# Altium PCB Step Up Converter_rev_final.PCBDOC
Units mm, origin at the board's own origin, x right, y up, seen from the top; angles counter-clockwise.
Board outline 30 x 20 mm, 4 copper layers (Top Layer, Layer 1, Layer 2, Bottom Layer), stack 0.603 mm thick; 24 components, 14 nets, 93 pads, 90 vias.
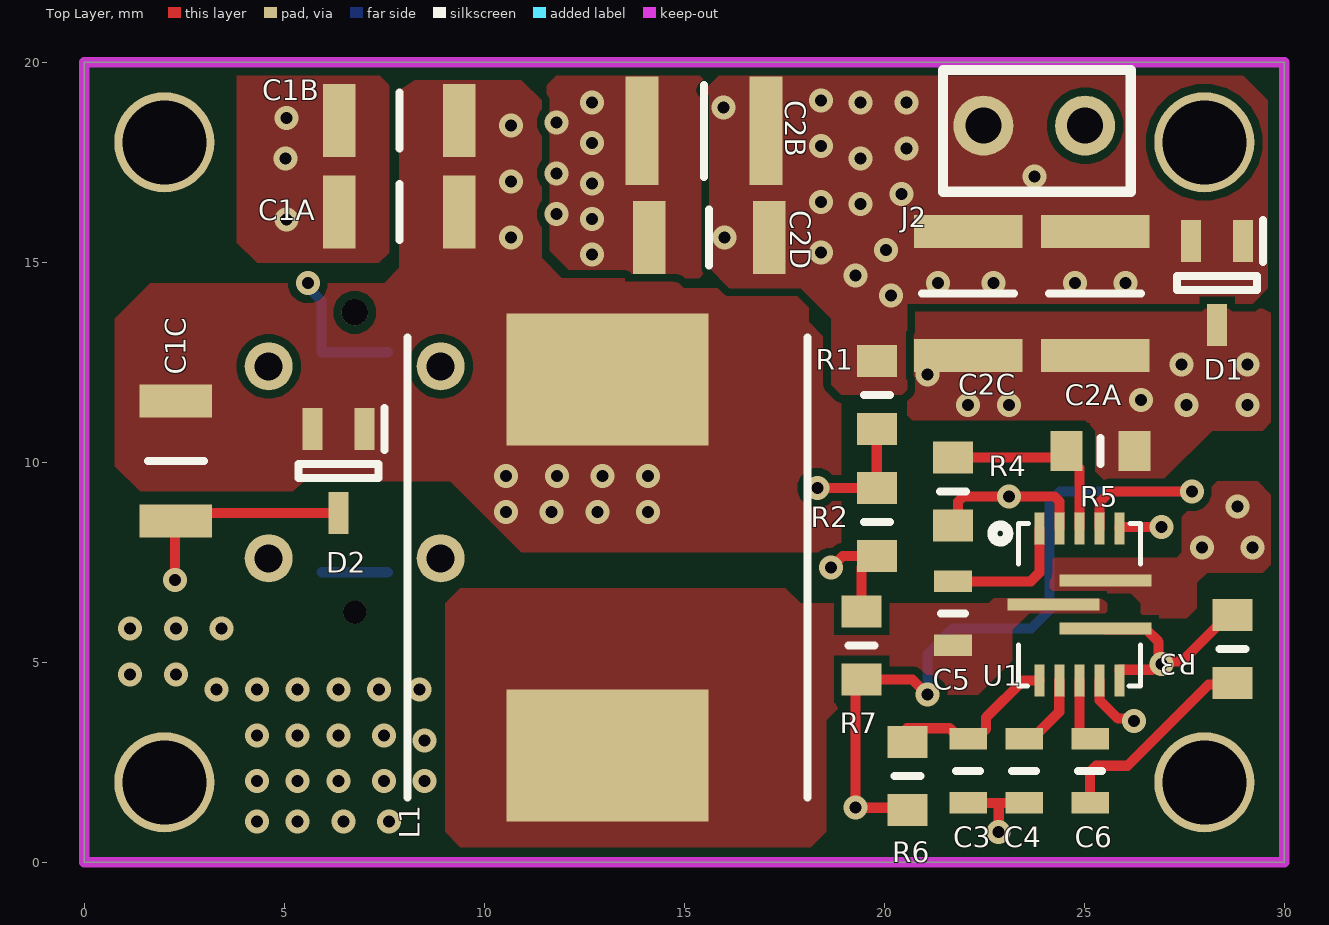
[diagram p0: Top Layer view]
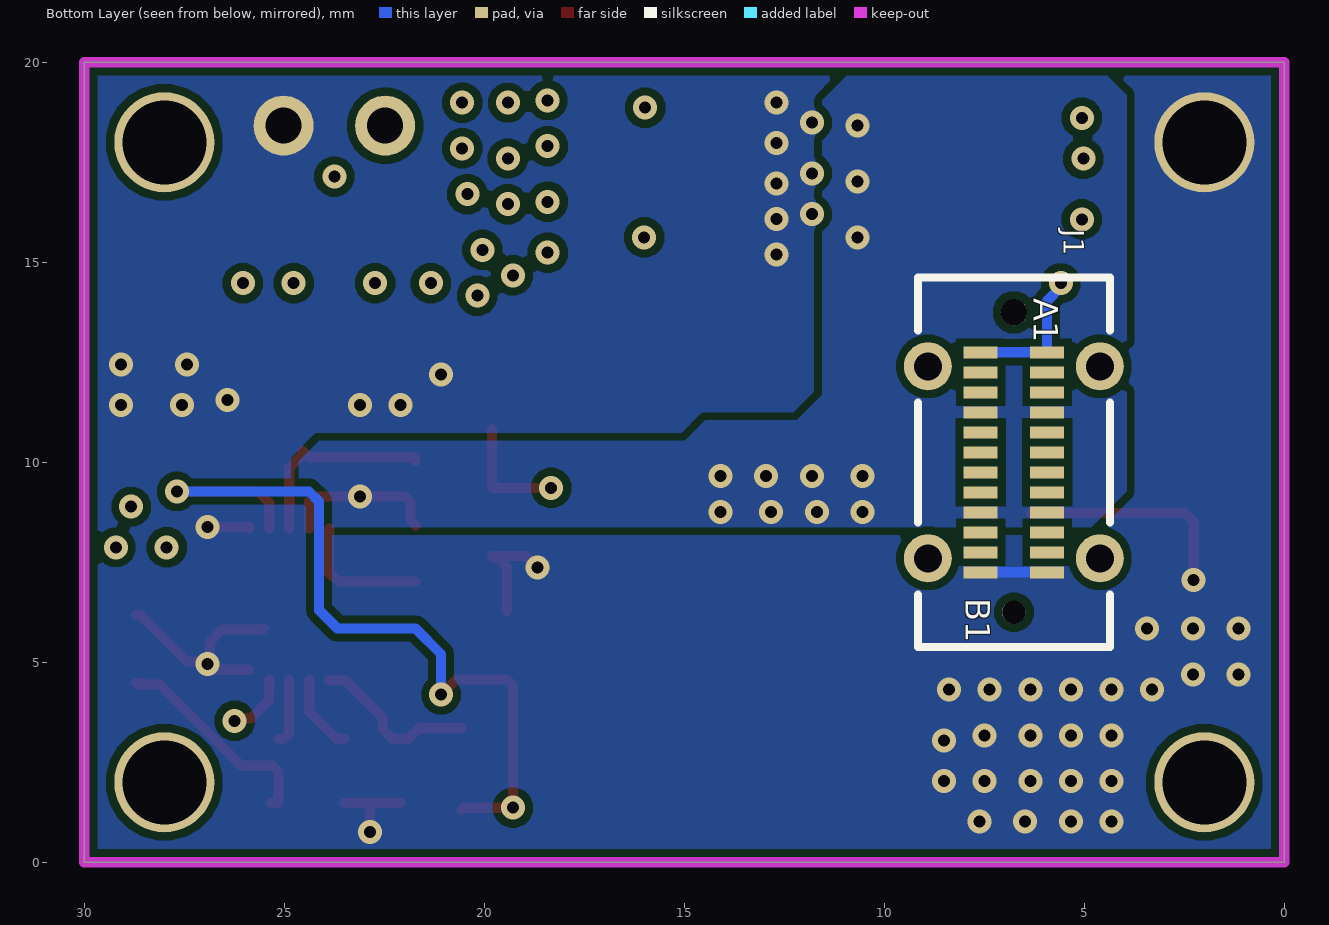
[diagram p1: Bottom Layer view, seen from below]
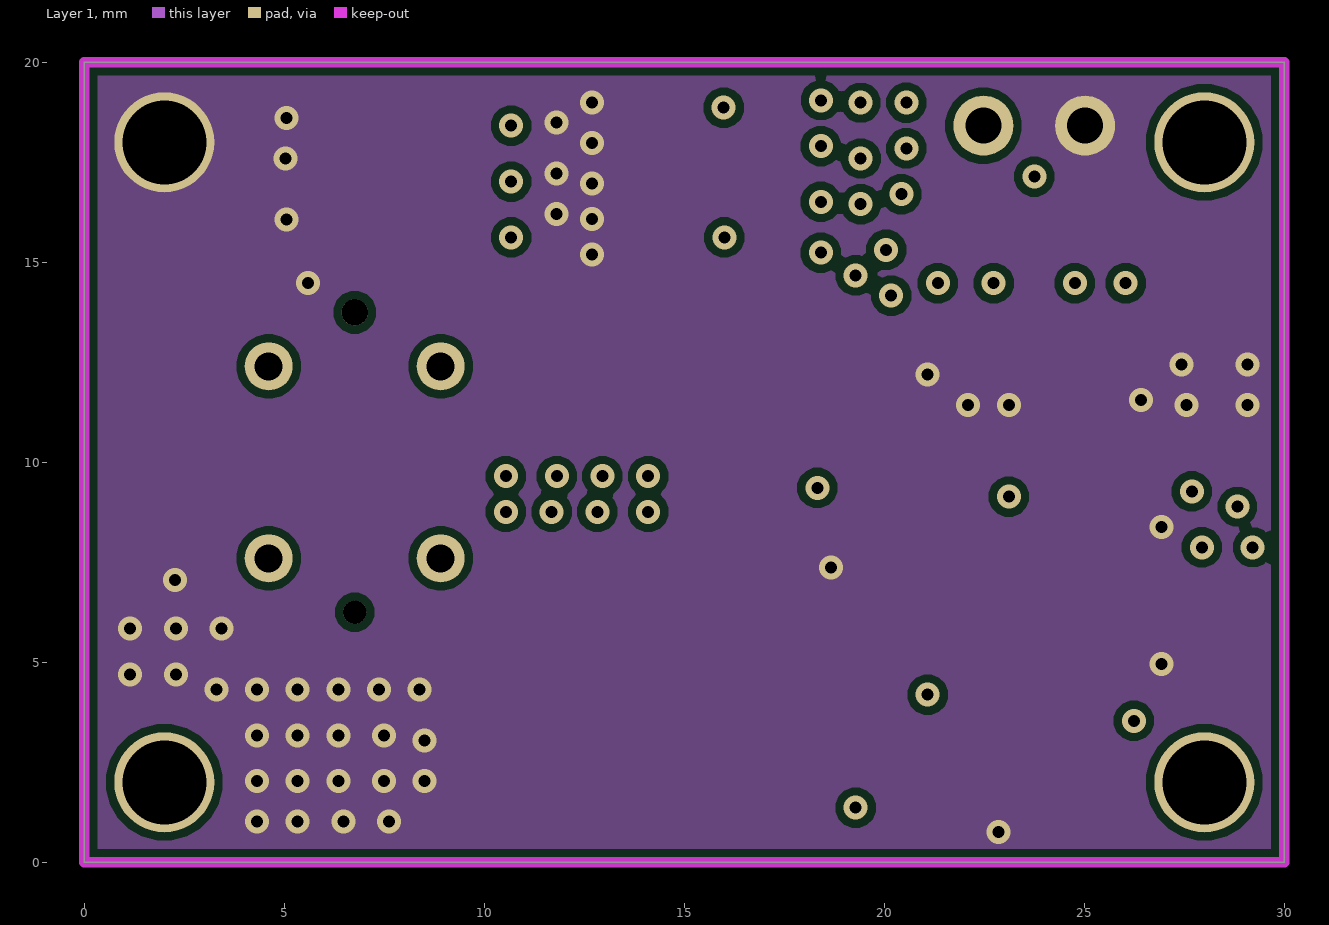
[diagram p2: Layer 1]
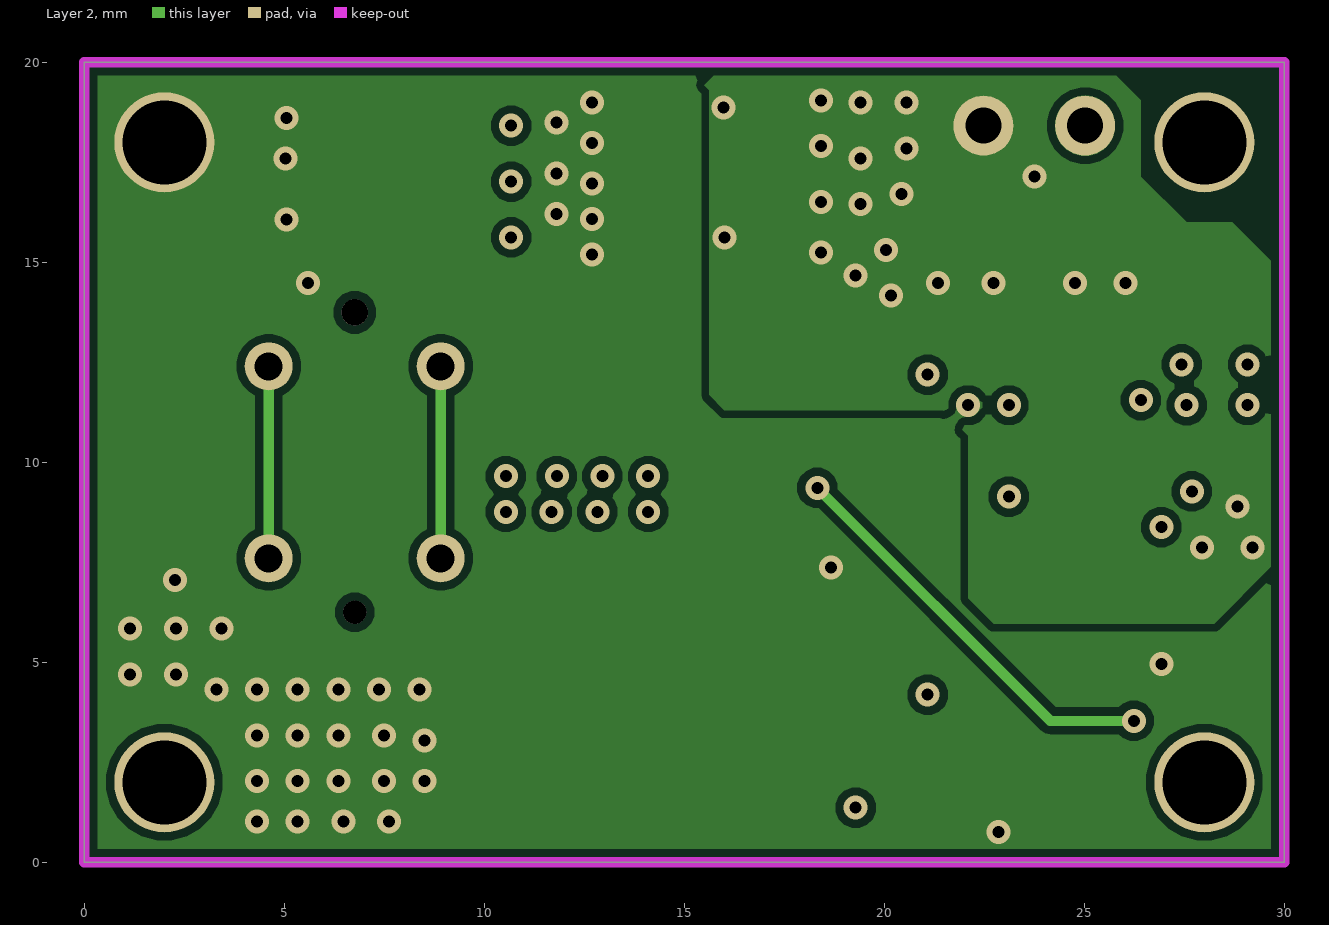
[diagram p3: Layer 2]
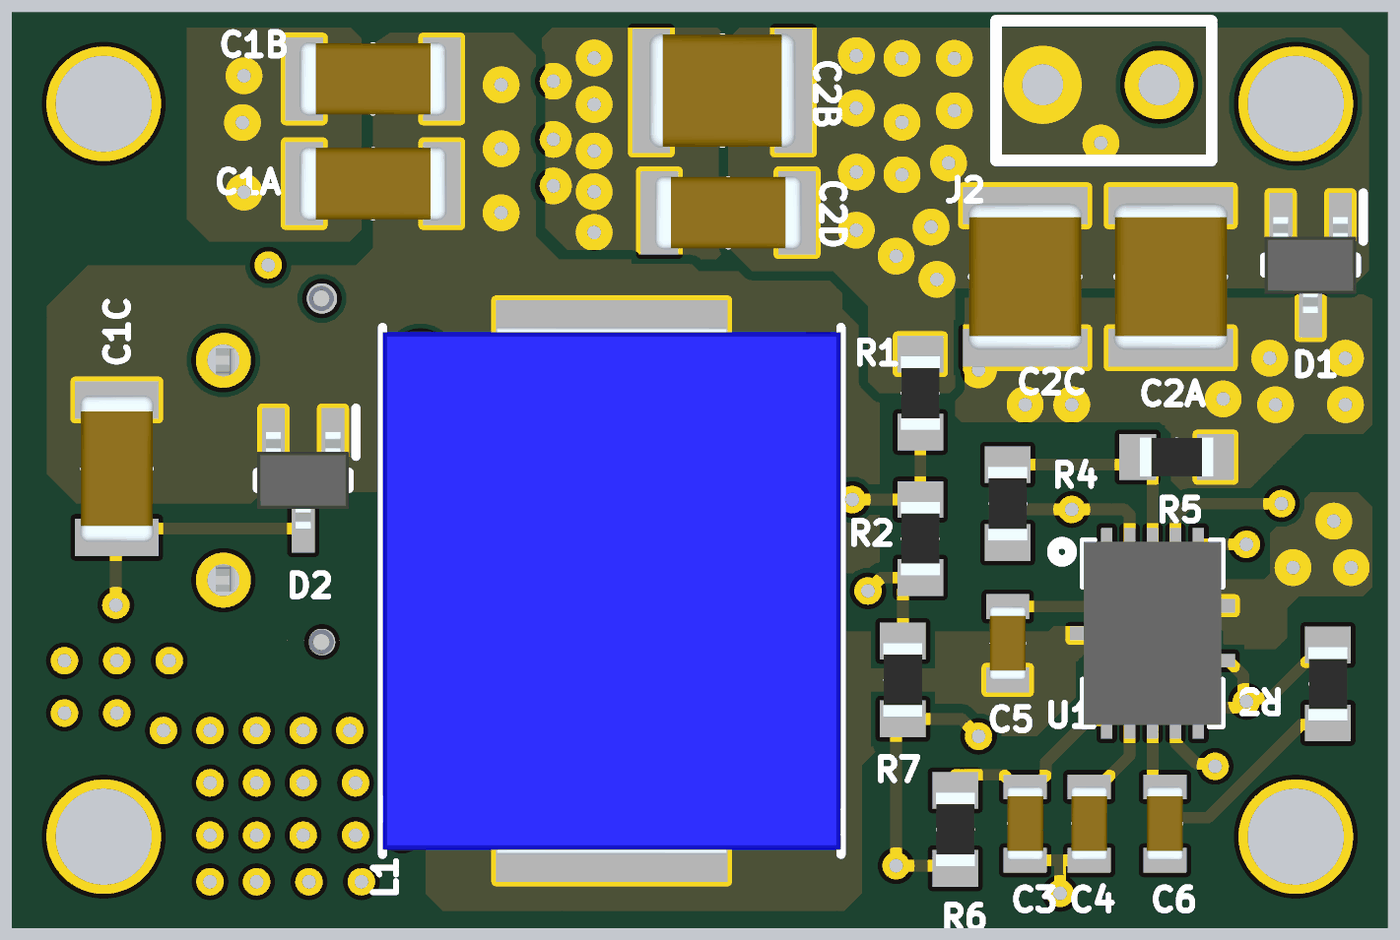
[diagram p4: 3D render of the assembled board from above, using the file's embedded part models]

## Layer stack, top to bottom
Top Solder: solder mask 0.0102, Solder Resist, Dk 3.5
Top Layer: signal copper 0.0356
Dielectric 2: prepreg 0.0711, PP-006, Dk 4.1
Layer 1: signal copper 0.035
Dielectric 1: dielectric 0.32, FR-4, Dk 4.8
Layer 2: signal copper 0.035
Dielectric 3: prepreg 0.0711, PP-006, Dk 4.1
Bottom Layer: signal copper 0.0356
Bottom Solder: solder mask 0.0102, Solder Resist, Dk 3.5

## Board outline
0,0 ccw(c0,0) 0,0 30,0 ccw(c30,0) 30,0 30,20 ccw(c30,20) 30,20 0,20 ccw(c0,20) 0,20
board region "Default Layer Stack Region": 0,0 0,20 30,20 30,0
board region "Default Layer Stack Region_1": 0,0 0,20 30,20 30,0

## Design rules (kind name [scope] priority, off if disabled: settings)
Clearance [All] p1: gap=0.2 ignorepadtopadclearanceinfootprint=FALSE except(0.1: Arc-Text Track-Text SMDPad-Text THPad-Text Via-Text Fill-Text Poly-Text Region-Text Text-Text; 0.127: SMDPad-SMDPad; 0.254: Arc-Via Track-Via Via-Via; 0.5: SMDPad-Hole THPad-THPad THPad-Hole)
ComponentClearance [All] p1: gap=0 collisioncheckmode=3 verticalgap=0 showdistances=TRUE
MinimumSolderMaskSliver [All] p1: minsoldermaskwidth=0.01
PolygonConnect PolygonConnect_1 [All vs IsNamedPolygon('GND_L02_P009')] p1: connectstyle=Relief reliefconductorwidth=0.254 reliefentries=4 polygonreliefangle="90 Angle" airgapwidth=0.254
PolygonConnect [All] p2: connectstyle=Direct reliefconductorwidth=0.254 reliefentries=4 polygonreliefangle="90 Angle" airgapwidth=0.254
RoutingVias [All] p1: holewidth=0.3 width=0.6 viastyle="Through Hole" minholewidth=0.3 minwidth=0.3 maxholewidth=0.6 maxwidth=0.8
SolderMaskExpansion [All] p1: expansion=0.102 istentingtop=FALSE
UnRoutedNet [All] p1: checkbadconnections=TRUE
Width [All] p1: maxlimit=10 minlimit=0.127 preferedwidth=0.254
27 further rules are at their usual default settings.

## Components (designator, comment, footprint, x,y, rotation, side; value= is the part's Value field where it differs from the comment)
C1A "Cap" CAPC3216X190N 7.874,16.256 r0 top value=22uF
C1B "Cap" CAPC3216X190N 7.874,18.542 r0 top value=22uF
C1C "Cap" CAPC3216X190N 2.286,10.033 r90 top value=22uF
C2A "Cap" CAPC3225X270N 25.273,14.224 r90 top value=22uF
C2B "Cap" CAPC3225X270N 15.494,18.288 r0 top value=22uF
C2C "Cap" CAPC3225X270N 22.098,14.224 r90 top value=22uF
C2D "Cap" CAPC3216X190N 15.621,15.621 r0 top value=0.1uF
C3 "Cap" CAPC1608X90N 22.098,2.286 r90 top value=4.7uF
C4 "Cap" CAPC1608X90N 23.495,2.286 r270 top value=22nF
C5 "Cap" CAPC1608X90N 21.717,6.223 r270 top value=0.1uF
C6 "Cap" CAPC1608X90N 25.146,2.286 r90 top value=8.2nF
D1 "ESDA25W" SOT65P210X110-3N 28.321,14.478 r270 top
D2 "ESDA25W" SOT65P210X110-3N 6.35,9.779 r270 top
J1 "632722110112" 632722110112 6.76,10 r270 bottom locked
J2 "conn" CONN 23.749,18.415 r0 top
L1 "1.5uH" INDPM115100X400N 13.081,7.366 r270 top locked
R1 "RC(0603_50V0805_150V1206_200V2512_200V" RESC1608X55N 19.812,11.684 r90 top value=750k
R2 "RC(0603_50V0805_150V1206_200V2512_200V" RESC1608X55N 19.812,8.509 r90 top value=187k
R3 "RC(0603_50V0805_150V1206_200V2512_200V" RESC1608X55N 28.702,5.334 r90 top value=3k
R4 "RC(0603_50V0805_150V1206_200V2512_200V" RESC1608X55N 21.717,9.271 r90 top value=30k
R5 "RC(0603_50V0805_150V1206_200V2512_200V" RESC1608X55N 25.4,10.287 r0 top value=34.8k
R6 "RC(0603_50V0805_150V1206_200V2512_200V" RESC1608X55N 20.574,2.159 r270 top value=NC
R7 "RC(0603_50V0805_150V1206_200V2512_200V" RESC1608X55N 19.431,5.422 r90 top value=NC
U1 "MP3429" FCQFN-13L(3MMX4MM) 24.877,6.442 r0 top locked

## Footprints (in the part's own frame and the unit in brackets; to place one, negate y for a bottom-side part, rotate by r counter-clockwise, add the part's x,y. Pads: shape width x height; smd on the part's side, far side on the other; paste and mask are expansions set on the pad)
632722110112 [mm]
  rect 0.3x0.85 smd: A1(-2.75,0.83) A2(-2.25,0.83) A3(-1.75,0.83) A4(-1.25,0.83) A5(-0.75,0.83) A6(-0.25,0.83) A7(0.25,0.83) A8(0.75,0.83) A9(1.25,0.83) A10(1.75,0.83) A11(2.25,0.83) A12(2.75,0.83) B1(2.75,-0.83) B2(2.25,-0.83) B3(1.75,-0.83) B4(1.25,-0.83) B5(0.75,-0.83) B6(0.25,-0.83) B7(-0.25,-0.83) B8(-0.75,-0.83) B9(-1.25,-0.83) B10(-1.75,-0.83) B11(-2.25,-0.83) B12(-2.75,-0.83)
  round 1.2 hole 0.7: S1(-2.4,2.15) S2(2.4,2.15) S3(-2.4,-2.15) S4(2.4,-2.15)
  round 0.66 hole 0.66 unplated: ""(-3.75,0)
  round 0.58 hole 0.58 unplated: ""(3.75,0)
  silkscreen extent -4.62,-2.4 4.62,2.4, body extent -4.47,-2.29 4.47,2.31, height 1
CAPC1608X90N [mm]
  rect 0.54x0.94 smd: 1(-0.8,0) 2(0.8,0)
  silkscreen extent 0,-0.3 0,0.3, body extent -0.8,-0.4 0.8,0.4, height 0.9
CAPC3216X190N [mm]
  rect 0.82x1.82 smd: 1(-1.5,0) 2(1.5,0)
  silkscreen extent 0,-0.7 0,0.7, body extent -1.6,-0.8 1.6,0.8, height 1.9
CAPC3225X270N [mm]
  rect 0.82x2.72 smd: 1(-1.55,0) 2(1.55,0)
  silkscreen extent 0,-1.15 0,1.15, body extent -1.6,-1.25 1.6,1.25, height 2.7
CONN [mm]
  round 1.5 hole 0.9: 1(-1.27,0) 2(1.27,0)
  silkscreen extent -2.29,-1.65 2.41,1.4
FCQFN-13L(3MMX4MM) [mm]
  rect 2.3x0.3 smd: 1(-0.65,0) 7(0.65,-0.6) 8(0.65,0.6)
  rect 0.25x0.8 smd: 2(-1,-1.9) 3(-0.5,-1.9) 4(0,-1.9) 5(0.5,-1.9) 6(1,-1.9) 9(1,1.9) 10(0.5,1.9) 11(0,1.9) 12(-0.5,1.9) 13(-1,1.9)
  silkscreen extent -2.17,-2.03 1.52,2.03, body extent -1.5,-2 1.5,2, height 1.1
INDPM115100X400N [mm]
  rect 3.3x5.05 smd: 1(-4.7,0) 2(4.7,0)
  silkscreen extent -5.75,-5 5.75,5, body extent -5.75,-5 5.75,5, height 4
RESC1608X55N [mm]
  rect 0.8x1 smd: 1(-0.85,0) 2(0.85,0)
  silkscreen extent 0,-0.33 0,0.33, body extent -0.8,-0.43 0.8,0.43, height 0.55
SOT65P210X110-3N [mm]
  rect 1.05x0.5 smd: 1(-1.05,0.65) 2(-1.05,-0.65) 3(1.05,0)
  silkscreen extent -1.58,-1 0.18,1.15, body extent -1.05,-1 1.05,1, height 1.1

## Part data
C1A C1B C1C: "16V, ceramic Capacitor", Manufacturer=muRata, Manufacturer P/N=GRM32R71C476KL, Package=1210
C2A C2B C2C: "25V, ceramic Capacitor", Manufacturer=muRata, Manufacturer P/N=GRM32R71E226KL, Package=1210
C2D: "25V, ceramic Capacitor", Manufacturer=muRata, Manufacturer P/N=GRM21AR71E105KL, Package=0805
C3: "25V, ceramic Capacitor", Manufacturer=muRata, Manufacturer P/N=GRM21AR71E475KL, Package=0805
C4: "50V ceramic capacitor", Manufacturer=muRata, Manufacturer P/N=GRM188R71H223KL, Package=0603
C5: "50V, ceramic Capacitor", Manufacturer=muRata, Manufacturer P/N=GRM21AR71H104KL, Package=0805
C6: "50V ceramic capacitor", Manufacturer=muRata, Manufacturer P/N=GRM188R71H472KL, Package=0603
D1 D2: "Diode", Manufacturer_Name=STMicroelectronics, Mouser2 Part Number=511-ESDA25W, Datasheet Link=https://componentsearchengine.com//ESDA25W.pdf, Height=1.1mm, Mouser2 Price/Stock=https://www.mouser.com/Search/Refine.aspx?Keyword=511-ESDA25W
  D1: Manufacturer_Part_Number=ESDA25W
  D2: Manufacturer P/N=ESDA25W
J1: "USB-C (USB TYPE-C) USB 3.1 (USB 3.1 Gen 2, Superspeed+) Receptacle Connector 24 Position Surface Mount, Through Hole", Package=None, Availability=Warning, DigiKey-Purchase-URL=https://snapeda.com/shop?store=DigiKey&id=3596593, Manufacturer P/N=632722110112, MF="Wurth Electronics", Mouser-Purchase-URL=https://snapeda.com/shop?store=Mouser&id=3596593, Price=None, SnapEDA_Link=https://www.snapeda.com/parts/632722110112/Wurth%20Electronics%20Inc./view-part/3596593/?ref=snap
L1: library part 104CDMCCDS-220MC, "Inductor", Manufacturer_Name=Sumida, Mouser2 Part Number=851-104CDMCCDS-220MC, Datasheet Link=https://componentsearchengine.com//104CDMCCDS-220MC.pdf, Height=4mm, Manufacturer_Part_Number=104CDMCCDS-220MC, Mouser2 Price/Stock=https://www.mouser.com/Search/Refine.aspx?Keyword=851-104CDMCCDS-220MC
R1 R6 R7: library part SMR, "Film resistor, 1%", Manufacturer=YAGEO, Manufacturer P/N=RC0603FR-07330KL, Package=0603
R2: library part SMR, "Film resistor, 1%", Manufacturer=YAGEO, Manufacturer P/N=RC0603FR-0741K2L, Package=0603
R3: library part SMR, "Film resistor, 5%", Manufacturer=YAGEO, Manufacturer P/N=RC0603FR-0710KL, Package=0603
R4: library part SMR, "Film resistor, 5%", Manufacturer=YAGEO, Manufacturer P/N=RC0603FR-0727KL, Package=0603
R5: library part SMR, "Film resistor, 5%", Package=0603
U1: "16V,17A Synchronous Boost  with Programmable Output Current Limit", Manufacturer=MPS, Manufacturer P/N=MP3429GL, Package=QFN-13(3mmx4mm)

## Free pads (board coordinates)
  round 2.5 hole 2.1: 0(2,2) 0(2,18) 0(28,2) 0(28,18)

## Via types
v1: diameter 0.6, hole 0.3, Top Layer to Bottom Layer, 90 vias

## Nets (pads, with @x,y where several pads share a name; then routed paths per layer and width w, separated by ;. In a path a pad name is that pad's centre, name@x,y a point inside that pad or via, vN(x,y) a via of type N, cw(c..) or ccw(c..) an arc to the next point about the centre after c; other vN are vias at no path point)
5V: C1A.2 C1B.2 C1C.2 D2.1 D2.2 J1.A4 J1.A9 J1.B4 J1.B9 L1.1 R4.1 U1.12 | length 4
  Top Layer w0.254: R4.1 21.844,8.548 21.844,9.017 21.971,9.144 24.257,9.144 24.377,9.024 U1.12
  other v1: 10.541,8.763 11.684,8.763 12.827,8.763 14.097,8.763 23.114,9.144 10.541,9.652 11.811,9.652 12.954,9.652 14.097,9.652 10.668,15.621 10.668,17.018 10.668,18.415
GND: C1A.1 C1B.1 C1C.1 C2A.1 C2B.1 C2C.1 C2D.1 C3.1 C4.2 D1.3 D2.3 J1.A1 J1.A12 J1.B1 J1.B12 J2.2 pad.0@2,18 R2.1 R3.2 R5.2 R7.2 U1.6 U1.7 U1.9 | length 22.3
  Top Layer w0.254: v1(2.266,7.055) 2.266,8.513 C1C.1 2.482,8.729 D2.3 ; v1(18.669,7.366) 18.962,7.659 R2.1 ; R7.2 19.431,7.378 19.673,7.62 R2.1@19.773,7.62 ; C3.1 22.796,1.486 ; v1(22.86,0.762) 22.86,1.422 22.796,1.486 ; C4.2 22.796,1.486 ; U1.7 25.55,5.819 26.55,5.819 26.858,5.511 26.858,5.019 v1(26.924,4.953) ; U1.9 25.877,8.38 25.879,8.382 v1(26.924,8.382) ; U1.6@25.879,4.815 26.692,4.815 26.83,4.953 v1(26.924,4.953) ; R3.2 28.602,6.184 27.437,5.019 26.99,5.019 v1(26.924,4.953)
  Bottom Layer w0.254: v1(5.588,14.478) 5.588,14.384 5.93,14.042 J1.A1 J1.B12 ; J1.A12 J1.B1
  other v1: 4.318,1.016 5.334,1.016 6.477,1.016 7.62,1.016 4.318,2.032 5.334,2.032 6.35,2.032 7.493,2.032 8.509,2.032 8.509,3.048 4.318,3.175 5.334,3.175 6.35,3.175 7.493,3.175 3.302,4.318 4.318,4.318 5.334,4.318 6.35,4.318 7.366,4.318 8.382,4.318 1.143,4.699 2.286,4.699 1.143,5.842 2.286,5.842 3.429,5.842 22.098,11.43 23.114,11.43 27.559,11.43 29.083,11.43 26.416,11.557 21.081,12.192 27.432,12.446 29.083,12.446 12.697,15.191 5.06,16.072 12.697,16.08 11.808,16.207 12.697,16.969 11.808,17.223 5.026,17.59 12.697,17.985 11.808,18.493 5.06,18.612 12.697,19.001
NetC2A_2: C2A.2 C2B.2 C2C.2 C2D.2 D1.1 D1.2 J2.1 R1.2 U1.8
  other v1: 27.94,7.874 29.21,7.874 28.829,8.89 20.173,14.167 21.336,14.478 22.733,14.478 24.765,14.478 26.035,14.478 19.284,14.675 18.415,15.24 20.046,15.31 16.002,15.621 19.411,16.453 18.415,16.51 20.427,16.707 23.749,17.145 19.411,17.596 20.554,17.85 18.415,17.907 15.982,18.866 19.411,18.993 20.554,18.993 18.415,19.05
NetC3_2: C3.2 R6.1 U1.2 | length 4.2
  Top Layer w0.254: R6.1@20.574,3.351 21.633,3.351 21.898,3.086 22.298,3.086 22.546,3.334 22.546,3.623 23.465,4.542 U1.2
NetC4_1: C4.1 U1.3 | length 1.9
  Top Layer w0.254: C4.1 23.695,3.086 24.375,3.766 24.375,4.54 U1.3
NetC5_1: C5.1 U1.13 | length 3.4
  Top Layer w0.254: C5.1 23.66,7.023 23.876,7.239 U1.13 U1.13
NetC5_2: C5.2 L1.2 U1.1
NetC6_1: C6.1 R3.1 | length 5.6
  Top Layer w0.254: C6.1@25.346,1.486 C6.1 25.146,2.264 25.295,2.413 26.079,2.413 28.111,4.445 R3.1@28.563,4.445 ; R3.1@28.563,4.445 28.663,4.445 R3.1 28.602,4.484 R3.1@28.563,4.445
NetC6_2: C6.2 U1.4 | length 1.6
  Top Layer w0.254: U1.4 24.877,3.229 25.02,3.086 C6.2
NetJ1_S1: J1.S1 J1.S2 | length 4.8
  Layer 2 w0.254: J1.S2 J1.S1
NetJ1_S3: J1.S3 J1.S4 | length 4.8
  Layer 2 w0.254: J1.S4 J1.S3
NetR1_1: R1.1 R2.2 U1.5 | length 14.9
  Top Layer w0.254: v1@18.288,9.398 v1(18.327,9.359) R2.2 R1.1 ; U1.5 25.379,4.54 25.379,4.053 25.749,3.683 25.751,3.683 25.841,3.593 26.184,3.593 v1(26.24,3.537)
  Layer 2 w0.254: v1(18.327,9.359) 24.149,3.537 v1(26.24,3.537)
NetR4_2: R4.2 R5.1 U1.11 | length 5.1
  Top Layer w0.254: R4.2@21.717,10.033 R4.2@21.805,10.121 ; R4.2 R4.2@21.805,10.121 ; U1.11 24.877,9.86 24.55,10.187 R5.1 24.384,10.121 R4.2@21.805,10.121
NetR6_2: R6.2 R7.1 U1.10 | length 20.4
  Top Layer w0.254: R6.2 20.517,1.366 v1(19.283,1.366) 19.283,4.424 R7.1 20.701,4.572 v1(21.082,4.191) ; U1.10 25.377,8.994 25.654,9.271 v1(27.686,9.271)
  Bottom Layer w0.254: v1(21.082,4.191) 21.082,5.207 21.723,5.848 23.679,5.848 24.13,6.299 24.13,9.017 24.384,9.271 v1(27.686,9.271)
pads on no net: J1. J1.A2 J1.A3 J1.A5 J1.A6 J1.A7 J1.A8 J1.A10 J1.A11 J1.B2 J1.B3 J1.B5 J1.B6 J1.B7 J1.B8 J1.B10 J1.B11

## Polygon pours and split planes (outlines as drawn)
GND on Bottom Layer "GND_L04_P020" (solid, remove dead copper, pour order 20): 0,0 0,20 30,20 30,0
5V on Bottom Layer "5V_L04_P009" (solid, remove dead copper, pour order 9): 14.478,11.049 14.986,10.541 24.13,10.541 24.638,10.033 24.638,8.89 24.13,8.382 8.128,8.382 4.826,8.382 3.937,9.271 3.937,11.049 3.937,19.177 4.445,19.685 10.922,19.685 11.557,19.05 11.557,11.684 12.192,11.049
NetC5_2 on Top Layer "NETC5_2_L01_P019" (solid, remove dead copper, pour order 19): 22.606,6.477 22.733,6.604 25.45,6.604 25.577,6.477 25.577,6.273 25.527,6.223 23.622,6.223 23.204,5.805 23.204,5.043 22.352,4.191 19.177,4.191 18.542,3.556 18.542,0.762 18.161,0.381 9.398,0.381 9.017,0.762 9.017,6.477 9.398,6.858 17.526,6.858 17.907,6.477
5V on Top Layer "5V_L01_P016" (solid, remove dead copper, pour order 16): 11.43,15.113 11.938,14.605 14.732,14.605 14.986,14.351 18.107,14.351 18.107,13.516 18.923,12.7 18.923,8.001 18.669,7.747 10.922,7.747 9.144,9.525 5.493,9.525 5.207,9.271 1.397,9.271 0.762,9.906 0.762,13.589 1.651,14.478 7.493,14.478 7.874,14.859 7.874,19.304 8.255,19.558 10.922,19.558 11.43,19.05
NetC2A_2 on Top Layer "NETC2A_2_L01_P011" (solid, pour order 11): 18.669,13.589 18.669,11.938 18.923,11.684 20.447,11.684 20.574,11.811 20.574,13.97 29.21,13.97 29.591,14.351 29.591,19.05 28.956,19.685 15.875,19.685 15.494,19.304 15.621,19.177 15.621,14.859 16.129,14.351 17.907,14.351
GND on Top Layer "GND_L01_P018" (solid, pour order 18): 3.81,19.685 3.81,15.494 4.318,14.986 7.366,14.986 7.62,15.24 7.62,19.431 7.239,19.812 4.318,19.812
NetC2A_2 on Top Layer "NETC2A_2_L01_P015" (solid, remove dead copper, pour order 15): 27.559,6.096 27.813,6.35 27.813,6.985 28.067,7.239 29.464,7.239 29.718,7.493 29.718,9.144 29.337,9.525 28.321,9.525 27.432,8.636 27.432,7.747 27.305,7.62 24.257,7.62 24.13,7.493 24.13,6.858 24.257,6.731 26.162,6.731 26.416,6.477 26.416,6.223 26.543,6.096
GND on Top Layer "GND_L01_P012" (solid, remove dead copper, pour order 12): 29.464,10.795 29.718,11.049 29.718,13.716 29.464,13.843 20.828,13.843 20.574,13.589 20.574,11.176 20.701,11.049 25.027,11.049 25.273,10.795 25.273,9.779 25.527,9.525 26.924,9.525 28.194,10.795
GND on Top Layer "GND_L01_P017" (solid, pour order 17): 15.24,19.812 15.621,19.431 15.621,14.859 15.367,14.605 12.319,14.605 11.557,15.367 11.557,19.431 11.938,19.812
GND on Layer 2 "GND_L03_P022" (solid, remove dead copper, pour order 22): 0,0 0,20 30,20 30,0
NetC2A_2 on Layer 2 "NETC2A_2_L03_P021" (solid, remove dead copper, pour order 21): 21.463,11.303 22.098,10.668 22.098,6.604 22.733,5.969 28.249,5.969 29.667,7.387 29.667,15.037 28.702,16.002 27.559,16.002 26.416,17.145 26.416,19.05 25.781,19.685 15.748,19.685 15.494,19.431 15.621,19.304 15.621,11.684 16.002,11.303
GND on Layer 1 "GND_L02_P010" (solid, remove dead copper, pour order 10): 0,0 0,20 30,20 30,0

## Keep-outs
Keep-Out Layer:
  lines w0.102: 4.534,-0.051 29.489,-0.051
  lines w0.254: 0,18.453 0,18.796 ; 0,0 0,20 30,20 30,0 0,0

## Silkscreen, mask and mechanical layers (free items; w line width, h text height)
Mechanical 4:
  lines w0.254: -52.705,-38.583 -47.625,-38.583 ; -52.705,5.867 -47.625,5.867 ; -52.705,50.317 -47.625,50.317 ; 8.255,-84.303 8.255,-79.223 ; 8.255,90.957 8.255,96.037 ; 69.215,-84.303 69.215,-79.223 ; 69.215,90.957 69.215,96.037 ; 109.855,-79.223 109.855,-53.823 186.055,-53.823 ; 109.855,-75.413 186.055,-75.413 ; 109.855,-71.603 186.055,-71.603 ; 109.855,-61.443 186.055,-61.443 ; 122.555,-71.603 122.555,-61.443 ; 130.175,-84.303 130.175,-79.223 ; 130.175,90.957 130.175,96.037 ; 155.575,-79.223 155.575,-71.603 ; 173.355,-71.603 173.355,-61.443 ; 186.055,-38.583 191.135,-38.583 ; 186.055,50.317 191.135,50.317 ; -52.705,-84.303 -52.705,96.037 191.135,96.037 191.135,-84.303 -52.705,-84.303 ; -47.625,-79.223 -47.625,90.957 186.055,90.957 186.055,-79.223 -47.625,-79.223
  text "A" at -23.924,90.513 h0.51
  text "B" at 37.457,90.513 h0.51
  text "C" at 97.782,90.513 h0.51
  text "D" at 158.742,90.513 h0.51
  text "1" at -52.006,70.193 h0.51
  text "1" at 186.754,70.193 h0.51
  text "2" at -52.006,25.108 h0.51
  text "2" at 186.754,25.108 h0.51
  text "3" at -52.006,-19.342 h0.51
  text "Title" at 111.125,-58.077 h0.51
  text "MP3213 Demo Board" at 124.333,-58.776 h0.51
  text "4" at -52.006,-64.427 h0.51
  text "4" at 186.754,-64.427 h0.51
  text "Size" at 111.125,-65.697 h0.51
  text "Number" at 123.825,-65.697 h0.51
  text "Rev" at 174.625,-65.697 h0.51
  text "EV3213-H-00B.pcb" at 140.335,-67.793 h0.51
  text "00B" at 178.054,-69.063 h0.51
  text "A" at 114.332,-71.73 h0.51
  text "Rebecca Liu" at 170.586,-74.752 h0.51
  text "11/01/11" at 128.905,-74.905 h0.51
  text "Date" at 111.125,-75.222 h0.51
  text "Drawn by" at 156.845,-75.222 h0.51
  text "Filename" at 111.125,-79.032 h0.51
  text "Sheet" at 156.845,-79.032 h0.51
  text "of" at 173.355,-79.032 h0.51
  text "A" at -23.924,-84.747 h0.51
  text "B" at 36.822,-84.747 h0.51
  text "C" at 97.782,-84.747 h0.51
  text "D" at 158.742,-84.747 h0.51

## Dimensions
30,20 to 30,0 on Mechanical 1
0,20 to 30,20 on Mechanical 1

## Text inside footprints (layer, text, board x,y; h text height)
J1: Mechanical 1 "out area" at 7.154,6.55 h0.13 r90; Mechanical 1 "pcb cut" at 6.9,6.55 h0.13 r90; Bottom Overlay "B1" at 7.96,6.6 h0.61 r90; Bottom Overlay "A1" at 6.26,14.1 h0.61 r90